# Altium PCB PCB.PcbDoc
Units mil, origin at the board's own origin, x right, y up, seen from the top; angles counter-clockwise.
Board outline 3815.03 x 1595.03 mil, 2 copper layers (Top Layer, Bottom Layer); 34 components, 24 nets, 91 pads, 348 vias.
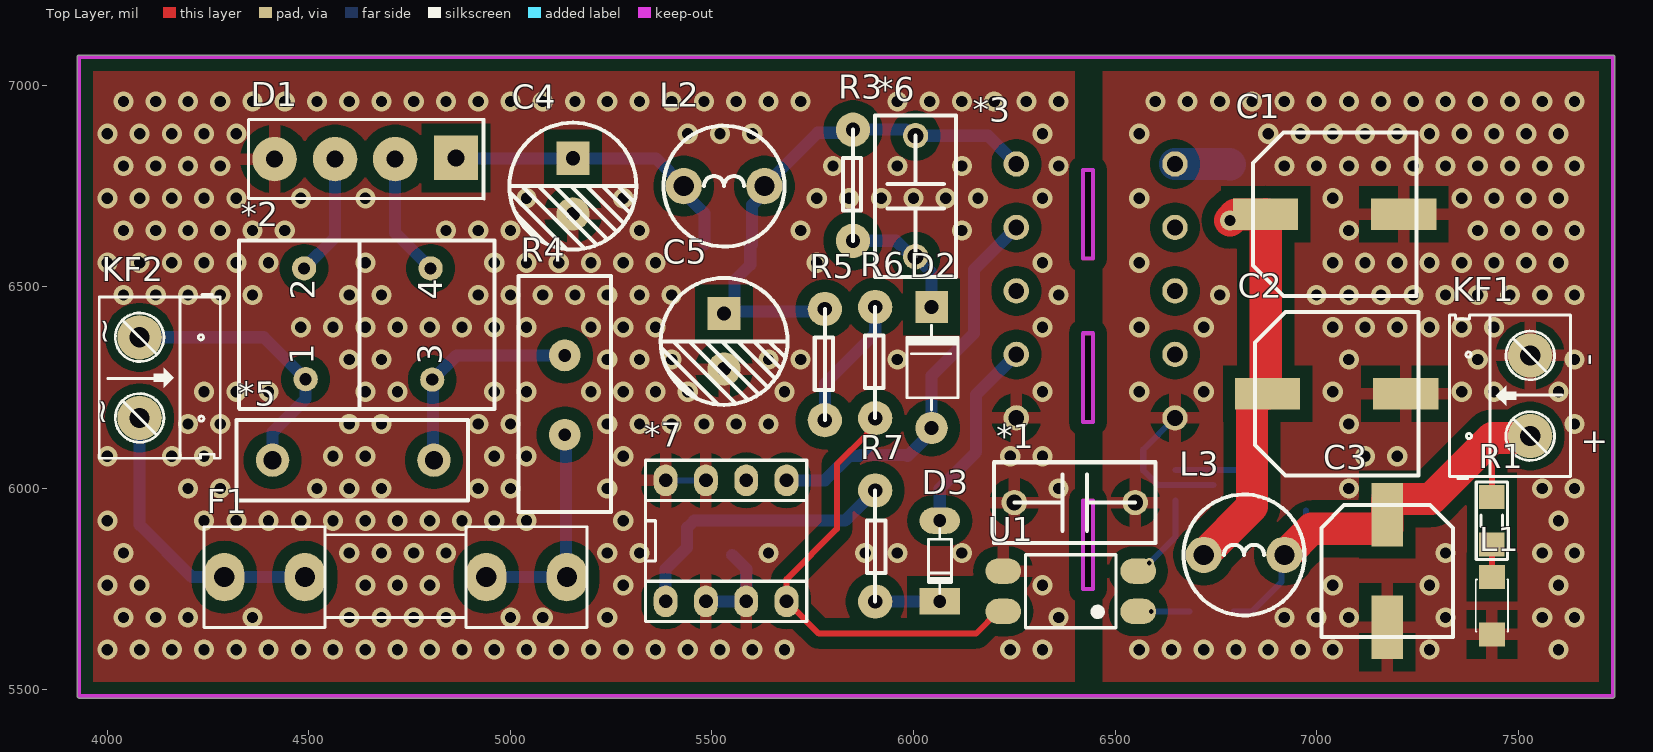
[diagram p0: Top Layer view]
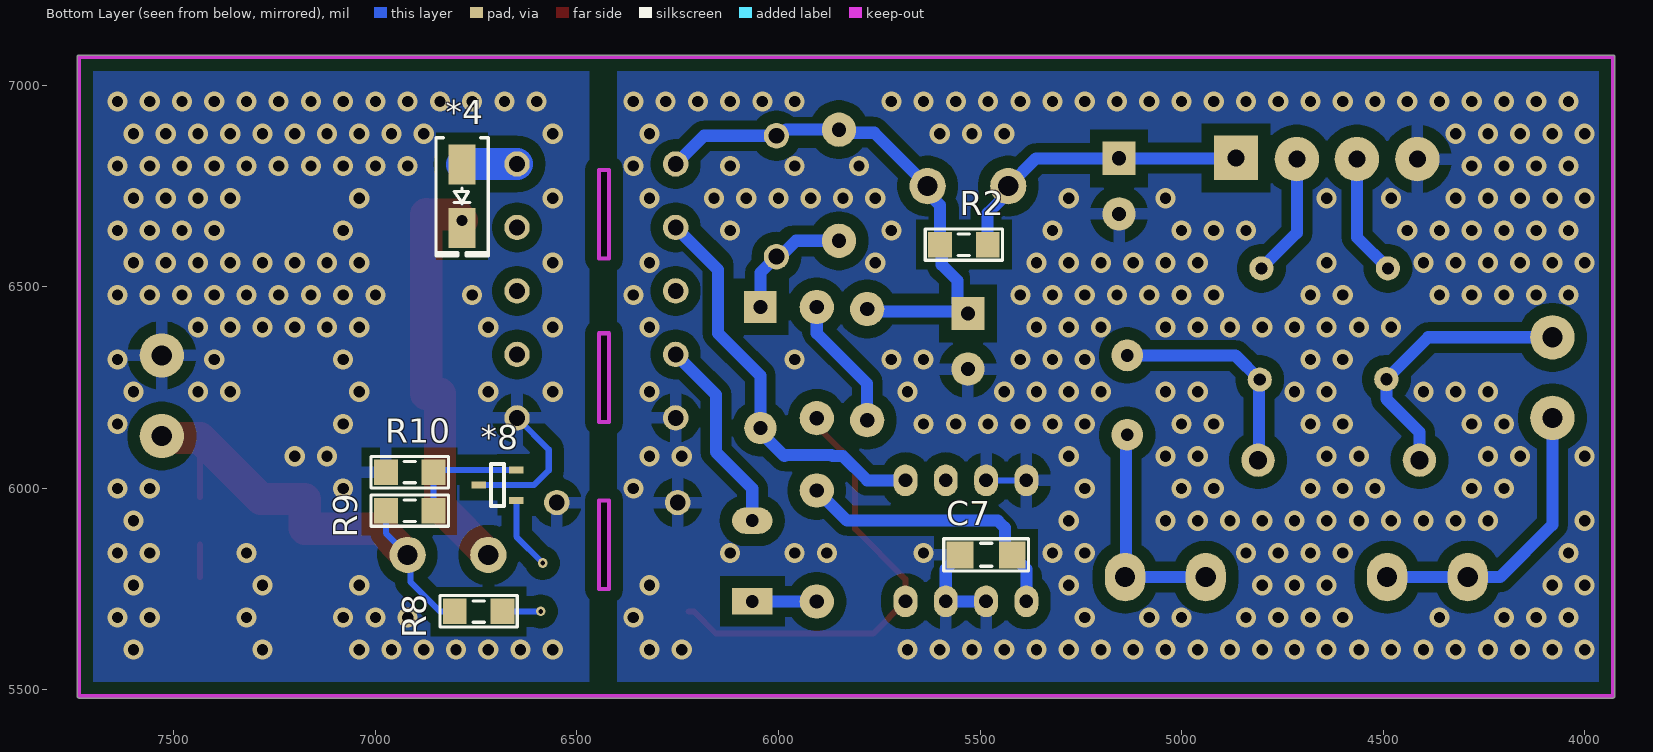
[diagram p1: Bottom Layer view, seen from below]
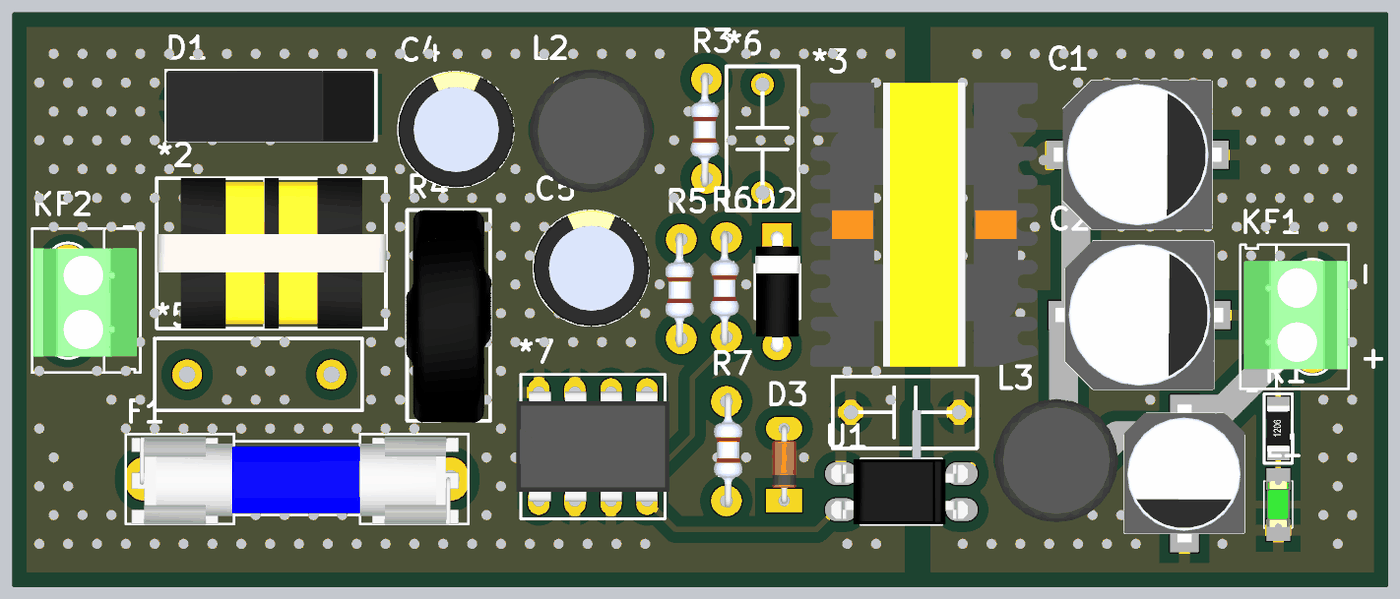
[diagram p2: 3D render of the assembled board from above, using the file's embedded part models]
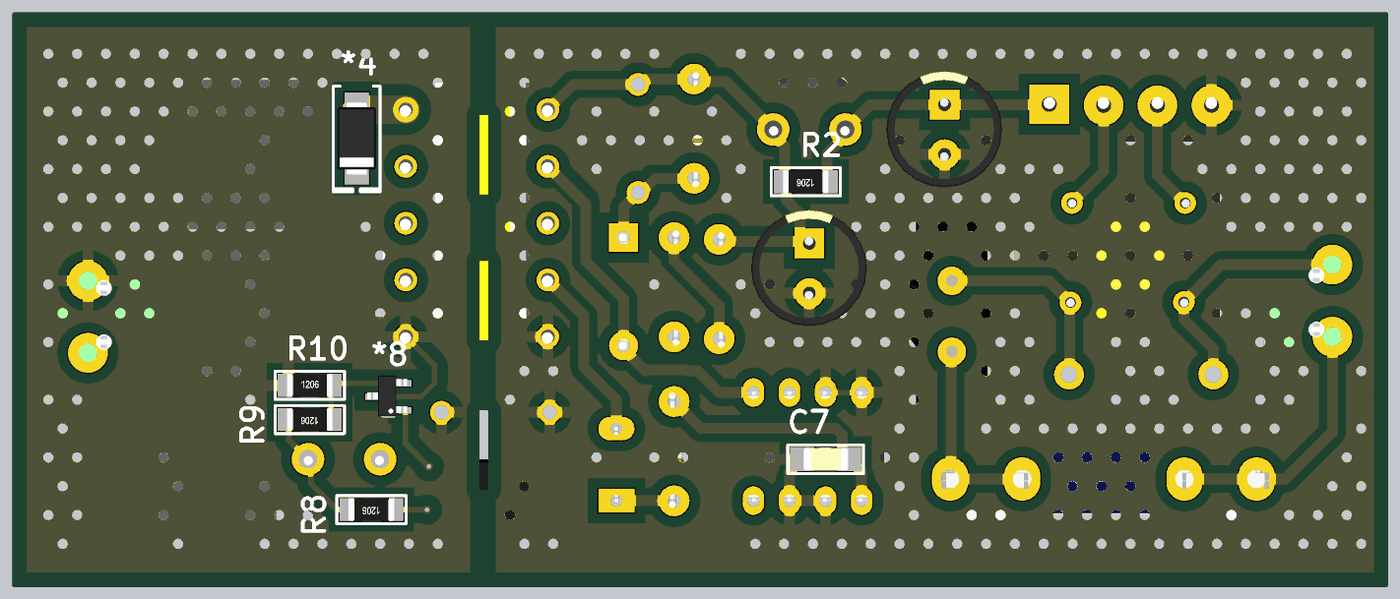
[diagram p3: 3D render of the assembled board from below, using the file's embedded part models]

## Layer stack, top to bottom
Top Solder: solder mask 0.4, Solder Resist, Dk 3.5
Top Layer: signal copper 1.4
Dielectric 1: dielectric 12.6, FR-4, Dk 4.8
Bottom Layer: signal copper 1.4
Bottom Solder: solder mask 0.4, Solder Resist, Dk 3.5

## Board outline
3930,5479.98 cw(c3930,5485) 3924.99,5485 3924.99,7070 cw(c3930,7070) 3930,7075.02 7735,7075.02 cw(c7735,7070) 7740.02,7070 7740.02,5485 cw(c7735,5485) 7735,5479.98
cut-out: 6420,6570 6420,6790 6445,6790 6445,6570
cut-out: 6420,6165 6445,6165 6445,6385 6420,6385
cut-out: 6420,5750 6445,5750 6445,5970 6420,5970

## Design rules (kind name [scope] priority, off if disabled: settings)
Clearance [All] p1: gap=30 ignorepadtopadclearanceinfootprint=FALSE
PlaneClearance [All] p1: clearance=30
PlaneConnect [All] p1: planeconnectstyle=Relief reliefexpansion=30 reliefentries=4 reliefconductorwidth=30 reliefairgap=10
PolygonConnect [All] p1: connectstyle=Relief reliefconductorwidth=30 reliefentries=4 polygonreliefangle="90 Angle" airgapwidth=30
RoomDefinition SCH [InComponentClass('SCH')] p1: confinementstyle=ConfineIn formatcopy=TRUE lockcomponents=FALSE outline 0,0 2000,0 2000,1000 0,1000
RoutingVias [All] p1: holewidth=28 width=50 viastyle="Through Hole" minholewidth=28 minwidth=50 maxholewidth=28 maxwidth=50
SolderMaskExpansion [All] p1: expansion=4 istentingtop=FALSE
Width [All] p1: maxlimit=80 minlimit=15 preferedwidth=30
28 further rules are at their usual default settings.

## Components (designator, comment, footprint, x,y, rotation, side; value= is the part's Value field where it differs from the comment)
*1 "Tu cao ap 101/1000V" "Tu cao ap" 6650,5865 r180 top
*2 "INDUCTOR UU9.8" "INDUCTOR UU9.8" 4605,6330 r90 top
*3 "Transformer EE22" "TRANSFORMER EE22" 6908.54,6407.32 r0 top
*4 "Diode SS54 (1N5824)" "DIODE SMA" 6785,6725 r270 bottom
*5 "Tu keo vang 0.1uF" "Tu keo vang 0.1uF" 4920,6020 r0 top
*6 "Tu cao ap 2.2nF 1KV" "Tu cao ap" 6105,6975 r270 top
*7 "TNY266" DIP8 5535,5870 r0 top
*8 "TL431" "TL431 SOT-23-3" 6640,5985 r0 bottom
C1 "1000uF" "tu nhom 10 (G)" 7045,6680 r0 top
C2 "1000uF" "tu nhom 10 (G)" 7050,6235 r0 top
C3 "470uF" "tu nhom 8 (f)" 7175,5795.24 r270 top
C4 "4.7uF/400V" "tu hoa 8mm" 5155,6750 r270 top
C5 "4.7uF/400V" "tu hoa 8mm" 5530,6365 r270 top
C7 "104" "tu 1206" 5485,5835 r180 bottom
D1 "2A 600V" "DIODE CAU 2A 3A CAM" 4865,6818 r180 top
D2 "1N4973" "DIODE 1A" 6045,6100 r270 top
D3 "1N4148" "DIODE 0.5A" 6065,5820 r90 top
F1 "2A" "De Cau Chi 520 630" 4715,5780 r180 top
KF1 "5V/3A" "Con 2 KF301 5.08" 7530,6130 r90 top
KF2 "AC in" "Con 2 KF301 5.08" 4080,6375 r270 top
L1 "LED 0805" LED-1206-Green 7435,5780 r270 top
L2 "2.2mH/3A" "CUON CAM 100uH3A" 5530,6750 r0 top
L3 "10uH - 3A" "CUON CAM 100uH3A" 6820,5835 r0 top
R1 "200R" "tro smd 1206" 7435,5920 r90 top
R2 "1.2k" "tro smd 1206" 5540,6605 r0 bottom
R3 "200K" "Dien tro" 5850,6614.41 r90 top
R4 "10D-9" "tro nhiet d-9" 5135,6231.57 r270 top
R5 "2M" "Dien tro" 5780,6169.41 r90 top
R6 "2M" "Dien tro" 5905,6174.41 r90 top
R7 "10K" "Dien tro" 5905,5995 r270 top
R8 "1k" "tro smd 1206" 6744.06,5695 r0 bottom
R9 "4.7k" "tro smd 1206" 6915,5945 r0 bottom
R10 "4.7k" "tro smd 1206" 6915,6040 r180 bottom
U1 "OPTO PC817 SMD" SOP4 6390,5745 r180 top value=PC817

## Footprints (in the part's own frame and the unit in brackets; to place one, negate y for a bottom-side part, rotate by r counter-clockwise, add the part's x,y. Pads: shape width x height; smd on the part's side, far side on the other; paste and mask are expansions set on the pad)
"Con 2 KF301 5.08" [mil]
  round 110 hole 50: 1(0,0) 2(200,0)
  silkscreen extent -106,-100 300,200, body extent -45,-97 255,190, height 335
"CUON CAM 100uH3A" [mil] "100uH3A"
  round 90 hole 50: 1(-100,0) 2(100,0)
  silkscreen extent -150,-150 150,150, body extent -171,-175 171,167, height 394
"De Cau Chi 520 630" [mil] "De Fuse"
  oval 100x120 hole 50: 1(-425,0) 1(-225,0) 2(225,0) 2(425,0)
  silkscreen extent -475,-125 475,125, body extent -448,-117 459,127, height 378
"Dien tro" [mm] "c?m"
  round 2.16 hole 0.9: 1(0,0) 2(7,0)
  silkscreen extent 0,-0.51 7,0.64, body extent -0.62,-0.87 7.48,1.13, height 2.5
"DIODE 0.5A" [mil] "Diode muoi, xung"
  oval 65x100 hole 32: 1(100,0)
  rect 65x100 hole 32: 2(-100,0)
  silkscreen extent -80,-30 80,28, body extent -108,-33 108,32, height 61
"DIODE 1A" [mil] "Diode 1A"
  round 80 hole 35: 1(-50,0)
  rect 80x80 hole 35: 2(-350,0)
  silkscreen extent -305,-61 -95,65, body extent -366,-61 -34,65, height 122
"DIODE CAU 2A 3A CAM" [mil] "DIODE CAU 2A 3A CAM"
  round 110 hole 42: 1(450,1) 2(300,1) 3(151,1)
  rect 110x110 hole 42: 4(0,-2)
  silkscreen extent -70,-97 515,100, body extent -62,-95 512,102, height 650
"DIODE SMA" [mm] "SMA"
  rect 2.5x1.7 smd: 1(-2,0) 2(2,0)
  silkscreen extent -3.68,-1.65 3.75,1.65, body extent -2.6,-1.37 2.6,1.37, height 2.4
DIP8 [mm] "W.300/L.400"
  oval 1.5x2 hole 0.864: 1(-3.81,-3.81) 2(-1.27,-3.81) 3(1.27,-3.81) 4(3.81,-3.81) 5(3.81,3.81) 6(1.27,3.81) 7(-1.27,3.81) 8(-3.81,3.81)
  silkscreen extent -5.08,-5.08 5.08,5.08, body extent -5.4,-3.88 5.4,3.88, height 4.5
"INDUCTOR UU9.8" [mil]
  round 60 hole 30: 1(-59,113) 2(216,117) 3(-60,-201) 4(216,-197)
  silkscreen extent -133,-356 285,279, body extent -132,-357 286,279, height 602
LED-1206-Green [mil]
  rect 60x65 smd: 1(0,0) 2(142,0)
  silkscreen extent 6,-40 136,40, body extent 7,-31 133,32, height 43
SOP4 [mm]
  oval 2.25x1.6 smd: 1(-4.25,1.27) 2(-4.25,-1.27) 3(4.25,-1.27) 4(4.25,1.27)
  silkscreen extent -2.85,-2.3 2.85,2.3, body extent -4.67,-2.29 4.93,2.31, height 3.6
"TL431 SOT-23-3" [mm]
  rect 0.9x0.44 smd: 1(0.264,0.373) 2(0.264,-1.547) 3(2.634,-0.587)
  silkscreen extent 1.05,-1.91 1.86,0.73, body extent 0.13,-2.09 2.93,0.81, height 1.3
"TRANSFORMER EE22" [mm]
  round 1.6 hole 1: 1(-16.6,10.1) 2(-16.6,6.1) 3(-16.6,2.1) 4(-16.6,-1.9) 5(-16.6,-5.9) 6(-6.6,-5.9) 7(-6.6,-1.9) 8(-6.6,2.1) 9(-6.6,6.1) 10(-6.6,10.1)
  body extent -19.6,-8.01 -3.57,12.01, height 20.81
"tro nhiet d-9" [mm]
  round 2 hole 0.8: 1(-2.5,0) 2(2.5,0)
  silkscreen extent -7.49,-2.92 7.37,2.92, body extent -7.5,-3 7.5,3, height 23.5
"tro smd 1206" [mm]
  rect 1.5x1.6 smd: 1(-1.5,0) 2(1.5,0)
  silkscreen extent -2.44,-0.99 2.44,0.99, body extent -1.6,-0.8 1.6,0.8, height 0.6
"tu 1206" [mm]
  rect 1.7x1.7 smd: 1(-1.65,0) 2(1.65,0)
  silkscreen extent -2.67,-1.02 2.67,1.02, body extent -1.57,-0.8 1.63,0.8, height 0.94
"Tu cao ap" [mm]
  round 1.6 hole 1: 1(2.54,-2.54) 2(10.16,-2.54)
  silkscreen extent 1.27,-5.08 11.43,0
"tu hoa 8mm" [mm]
  rect 2.1x2.1 hole 0.9: 1(-1.75,0)
  round 2.1 hole 0.9: 2(1.75,0)
  silkscreen extent -4,-4 4,4, body extent -4.1,-4.07 4.1,4.13, height 13.81
"Tu keo vang 0.1uF" [mil]
  round 82.68 hole 45: 1(-510,50) 2(-110,50)
  silkscreen extent -600,-50 -25,150
"tu nhom 8 (f)" [mm]
  rect 4x2 smd: 1(-3.55,0) 2(3.55,0)
  silkscreen extent -4.15,-4.15 4.15,4.15, body extent -4.85,-4.25 4.85,4.25, height 10.5
"tu nhom 10 (G)" [mm]
  rect 4.1x2 smd: 1(-4.35,0) 2(4.35,0)
  silkscreen extent -5.15,-5.15 5.15,5.15, body extent -5.9,-5.25 5.9,5.25, height 10.5

## Part data
*1: library part "Tu cao ap 1000V"
*7: library part TNY264
C1 C2: library part "Tu Nhom 1000uF 10V", "Dán", Chung_Loai=Dán, Don_Vi=Con, Ma_Hang=MH007515, So_Chan=2, Ten_Linh_Kien="Tụ Nhôm 1000uF 10V"
C3: library part "Tu Nhom 470uF 16V", "Dán", Chung_Loai=Dán, Don_Vi=Con, Ma_Hang=MH001940, So_Chan=2, Ten_Linh_Kien="Tụ Nhôm 470uF 16V 8x10.4MM"
C4 C5: library part "Tu Hoa 4.7uF 400V 8x12", "Cắm", Chung_Loai=Cắm, Don_Vi=Con, Ma_Hang=MH003744, So_Chan=2, Ten_Linh_Kien="Tụ Hóa 4.7uF 400V 8x12MM"
C7: library part "Tu 1206 104 50V 20%", "Dán", Chung_Loai=Dán, Don_Vi=Con, Ma_Hang=MH004544, So_Chan=2, Ten_Linh_Kien="Tụ 1206 104-0.1uF 20% 50V"
D1: library part "Diode CAU 2A VUONG", "Cắm", Chung_Loai=Cắm, Don_Vi=Con, Ma_Hang=MH001206, Ten_Linh_Kien="Diode Cầu 2A 600V KBP206 Vuông"
D2: library part "Diode 1N4007", "Cắm", Chung_Loai=Cắm, Don_Vi=Con, Ma_Hang=MH001063, Ten_Linh_Kien="Diode 1N4007 1A (DIP)"
D3: library part "Diode 1N4148", "Cắm", Chung_Loai=Cắm, Don_Vi=Con, Ma_Hang=MH001065, Ten_Linh_Kien="Diode 1N4148 DO35 450mA 100V ( 1N4148 DIP)"
F1: library part "De Cau Chi 520 630", "5x20mm", Ma_Hang=MH001473, Ten="Đế Cầu Chì 5x20MM 6x30MM SMD01"
KF1 KF2: library part "CON 2 KF301", "Cắm", Chung_Loai=Cắm, Don_Vi=Con, Ma_Hang=MH000987, Ten_Linh_Kien="CON 2 KF301-2P 5.08MM Xanh Dương"
L1: library part "LED 1206 Xanh La", "Dán", Chung_Loai=Dán, Don_Vi=Con, Ma_Hang=MH002947, Ten_Linh_Kien="LED1206 Màu Xanh Lá (Green)"
L2 L3: library part "CUON CAM 470uH DIP", "Cắm", Chung_Loai=Cắm, Don_Vi=Con, Ma_Hang=MH002232, Ten_Linh_Kien="Cuộn Cảm 470uH 3A 8x10MM"
R1: library part "Tro 1206 1% 200R", "Dán", Chung_Loai=Dán, Don_Vi=Con, Ma_Hang=MH005895, So_Chan=2, Ten_Linh_Kien="Trở 1206 1% 200R"
R2 R8: library part "Tro 1206 1% 1k", "Dán", Chung_Loai=Dán, Don_Vi=Con, Ma_Hang=MH005880, So_Chan=2, Ten_Linh_Kien="Trở 1206 1% 1k"
R3 R5 R6 R7: library part Resistor, "Cắm"
R4: library part "Tro Nhiet NTC 10D-9", "Cắm", Chung_Loai=Cắm, Don_Vi=Con, Ma_Hang=MH000922, So_Chan=2, Ten_Linh_Kien="Điện trở nhiệt NTC 10D-9"
R9 R10: library part "Tro 1206 5% 4.7K", "Dán", Chung_Loai=Dán, Don_Vi=Con, Ma_Hang=MH005908, So_Chan=2, Ten_Linh_Kien="Trở 1206 5% 4.7k"
U1: "Single Opto"

## Via types
v1: diameter 50, hole 28, Top Layer to Bottom Layer, tented both sides, 346 vias
v2: diameter 23.62, hole 11.81, Top Layer to Bottom Layer, tented both sides, 2 vias

## Nets (pads, with @x,y where several pads share a name; then routed paths per layer and width w, separated by ;. In a path a pad name is that pad's centre, name@x,y a point inside that pad or via, vN(x,y) a via of type N, cw(c..) or ccw(c..) an arc to the next point about the centre after c; other vN are vias at no path point)
Hi_groud: *1.2 *3.5 *7.2 *7.3 *7.7 *7.8 C4.2 C5.2 C7.1 D1.1 U1.3 | length 329.5
  Bottom Layer w15: *7.8 *7.7
  Bottom Layer w30: *7.2 *7.3 5585,5799.96 C7.1
  other v1: 4000,5600 4080,5600 4160,5600 4240,5600 4320,5600 4400,5600 4480,5600 4560,5600 4640,5600 4720,5600 4800,5600 4880,5600 4960,5600 5040,5600 5120,5600 5200,5600 5280,5600 5360,5600 5440,5600 5520,5600 5600,5600 5680,5600 6240,5600 6320,5600 4040,5680 4120,5680 4200,5680 4360,5680 4600,5680 4680,5680 4760,5680 4840,5680 5000,5680 5080,5680 5240,5680 6360,5680 4000,5760 4080,5760 4640,5760 4720,5760 4800,5760 5280,5760 6320,5760 4040,5840 4600,5840 4680,5840 4760,5840 4840,5840 5240,5840 5320,5840 5640,5840 5880,5840 5960,5840 6120,5840 4000,5920 4240,5920 4320,5920 4400,5920 4480,5920 4560,5920 4640,5920 4720,5920 4800,5920 4880,5920 4960,5920 5040,5920 5280,5920 4200,6000 4280,6000 4520,6000 4600,6000 4680,6000 4920,6000 5000,6000 5240,6000 6360,6000 4000,6080 4160,6080 4240,6080 4560,6080 4640,6080 4960,6080 5040,6080 5280,6080 6240,6080 6320,6080 4200,6160 4280,6160 4600,6160 4680,6160 4920,6160 5000,6160 5240,6160 5320,6160 5400,6160 5480,6160 5560,6160 5640,6160 4240,6240 4320,6240 4400,6240 4640,6240 4720,6240 4960,6240 5040,6240 5200,6240 5280,6240 5360,6240 5440,6240 5680,6240 6320,6240 4600,6320 4680,6320 5240,6320 5320,6320 5400,6320 5640,6320 5720,6320 5960,6320 4480,6400 4560,6400 4640,6400 4720,6400 4800,6400 4880,6400 4960,6400 5040,6400 5200,6400 5280,6400 5360,6400 6320,6400 4040,6480 4120,6480 4200,6480 4280,6480 4360,6480 4600,6480 4680,6480 4920,6480 5000,6480 5080,6480 5160,6480 5240,6480 5320,6480 5400,6480 6360,6480 4000,6560 4080,6560 4160,6560 4240,6560 4320,6560 4400,6560 4640,6560 4960,6560 5040,6560 5120,6560 5200,6560 5280,6560 5360,6560 5760,6560 6320,6560 4040,6640 4120,6640 4200,6640 4280,6640 4360,6640 4440,6640 4840,6640 4920,6640 5000,6640 5320,6640 5720,6640 6120,6640 4000,6720 4080,6720 4160,6720 4240,6720 4320,6720 4480,6720 4640,6720 5040,6720 5280,6720 5760,6720 5840,6720 5920,6720 6000,6720 6080,6720 6160,6720 6320,6720 4040,6800 4120,6800 4200,6800 4280,6800 5800,6800 5960,6800 6120,6800 6360,6800 4000,6880 4080,6880 4160,6880 4240,6880 4320,6880 5440,6880 5520,6880 5600,6880 6320,6880 4040,6960 4120,6960 4200,6960 4280,6960 4360,6960 4440,6960 4520,6960 4600,6960 4680,6960 4760,6960 4840,6960 4920,6960 5000,6960 5080,6960 5160,6960 5240,6960 5320,6960 5400,6960 5480,6960 5560,6960 5640,6960 5720,6960 5960,6960 6040,6960 6120,6960 6200,6960 6280,6960 6360,6960
Lo_gnd: *1.1 *3.6 *8.3 C1.2 C2.2 C3.2 KF1.2 L1.2 R10.1 | length 351.6
  Bottom Layer w15: *3.6 6570,6096.34 6570,6045 6606.88,6008.12 *8.3
  other v1: 6560,5600 6640,5600 6720,5600 6800,5600 6880,5600 6960,5600 7040,5600 7280,5600 7600,5600 6920,5680 7000,5680 7080,5680 7320,5680 7560,5680 7640,5680 7040,5760 7280,5760 7600,5760 7320,5840 7560,5840 7640,5840 7600,5920 7080,6000 7560,6000 7640,6000 7120,6080 7200,6080 7080,6160 7640,6160 6560,6240 6720,6240 7040,6240 7360,6240 7440,6240 7600,6240 7080,6320 7400,6320 7640,6320 6560,6400 6720,6400 7040,6400 7120,6400 7200,6400 7280,6400 7360,6400 7440,6400 6760,6480 7000,6480 7080,6480 7160,6480 7240,6480 7320,6480 7400,6480 7480,6480 7560,6480 7640,6480 6560,6560 7040,6560 7120,6560 7200,6560 7280,6560 7360,6560 7440,6560 7520,6560 7600,6560 7080,6640 7400,6640 7480,6640 7560,6640 7640,6640 6560,6720 7040,6720 7360,6720 7440,6720 7520,6720 7600,6720 6920,6800 7000,6800 7080,6800 7160,6800 7240,6800 7320,6800 7400,6800 7480,6800 7560,6800 7640,6800 6560,6880 6880,6880 6960,6880 7040,6880 7120,6880 7200,6880 7280,6880 7360,6880 7440,6880 7520,6880 7600,6880 6600,6960 6680,6960 6760,6960 6840,6960 6920,6960 7000,6960 7080,6960 7160,6960 7240,6960 7320,6960 7400,6960 7480,6960 7560,6960 7640,6960
Net*2_1: *2.1 *5.1 KF2.1 | length 697.1
  Bottom Layer w15: *5.1@4405,6070 4410,6075 *5.1
  Bottom Layer w30: KF2.1 4388,6375 *2.1 4492,6222 4410,6140 *5.1@4410,6075
Net*2_2: *2.2 D1.2 | length 302.9
  Bottom Layer w30: *2.2 4565,6623 D1.2
Net*2_3: *2.3 *5.2 R4.1 | length 555.5
  Bottom Layer w30: *5.2 4808,6072 4808,6268 *2.3 4866,6330 R4.1
Net*2_4: *2.4 D1.3 | length 307.5
  Bottom Layer w30: D1.3 4714,6634 *2.4
Net*3_1: *3.1 *6.1 C5.1 L2.2 R2.2 R3.2 R5.2 | length 1561.4
  Bottom Layer w15: C5.1 5535.55,6439.45 5541.1,6445 R5.2
  Bottom Layer w30: C5.1@5535.55,6439.45 5774.45,6439.45 R5.2 ; C5.1@5541.1,6445 5556.34,6460.24 5556.34,6516.34 5595,6555 5595,6600.94 R2.2 5599.06,6702.82 5630,6733.76 L2.2 5762.48,6882.48 5842.48,6882.48 R3.2 5981.07,6890 5996.07,6875 *6.1 6184.96,6875 *3.1
Net*3_2: *3.2 *7.5 D2.1 | length 1006.3
  Bottom Layer w30: *7.5 5780,6020 5840,6080 5866.23,6080 5868.75,6082.52 5982.48,6082.52 5985,6080 6045,6140 D2.1 6045,6280 6150,6385 6150,6542.48 *3.2
Net*3_4: *3.4 D3.1 | length 491.2
  Bottom Layer w30: D3.1 6065,6000 6155,6090 6155,6232.52 *3.4
Net*3_10: *3.10 *4.1 | length 138.1
  Bottom Layer w60: *3.10 *3.10 *3.10@6650,6805
  Bottom Layer w80: *3.10 6783.78,6804.96 *4.1
Net*4_2: *4.2 C1.1 C2.1 L3.1 | length 1023
  Top Layer w80: L3.1 6840,5955 6840,6234.37 6840.63,6235 C2.1@6874.37,6235 ; v1(6785,6665) 6799.37,6679.37 6873.11,6679.37 C1.1 C2.1@6873.74,6235.63
Net*6_2: *6.2 D2.2 R3.1 | length 312.9
  Bottom Layer w30: R3.1 5956.66,6614.41 5996.07,6575 *6.2 6045,6535 D2.2
Net*7_1: *7.1 C7.2 R7.1 | length 709.4
  Bottom Layer w30: *7.1 5385,5799.96 C7.2 5438.5,5853.46 5438.5,5902.43 5456.08,5920 5830,5920 R7.1
Net*7_4: *7.4 R6.1 U1.4 | length 1139.1
  Top Layer w15: R6.1 5905,6155.46 5883.73,6134.19 5883.73,6133.73 5810,6060 5810,5900 5685,5775 *7.4 5765,5640 6155,5640 6210,5695 U1.4
Net*8_1: *8.1 U1.2 | length 182.4
  Bottom Layer w15: v2(6585,5815) 6650.39,5880.39 *8.1
Net*8_2: *8.2 R9.1 R10.2 | length 303
  Bottom Layer w15: *8.2 6850.03,6045.91 R10.2 R9.1
NetC3_1: C3.1 KF1.1 L3.2 R1.2 R8.2 R9.2 | length 1272.1
  Top Layer w15: R1.2 7435,6125
  Top Layer w80: L3.2 6922.71,5835 6987.71,5900 7174.37,5900 7175,5900.63 7175,5973.11 7175.63,5973.74 7283.74,5973.74 7435,6125 7525,6125 KF1.1
  Bottom Layer w15: R8.2@6794.06,5695 6840,5695 6912.5,5767.5 6912.5,5827.5 L3.2 6974.06,5889.06 R9.2
NetC4_1: C4.1 D1.4 L2.1 R2.1 | length 760.1
  Bottom Layer w30: D1.4 4866.1,6818.9 C4.1 5361.1,6818.9 L2.1 5430,6733.76 5480.94,6682.82 R2.1
NetD3_2: D3.2 R7.2 | length 160.2
  Bottom Layer w30: R7.2 5905.3,5719.7 6064.7,5719.7 D3.2
NetF1_1: F1.1 R4.2 | length 555.2
  Bottom Layer w30: F1.1@4940,5780 5140,5780 5137.5,5782.5 5137.5,6130.65 R4.2
NetF1_2: F1.2 KF2.2 | length 728.8
  Bottom Layer w30: KF2.2 4080,5910 4210,5780 4290,5780 F1.2@4490,5780
NetL1_1: L1.1 R1.1 | length 80.9
  Top Layer w15: L1.1 R1.1
NetR5_1: R5.1 R6.2 | length 332.4
  Bottom Layer w30: R5.1 5780,6260 5905,6385 R6.2
NetR8_1: R8.1 U1.1 | length 95
  Bottom Layer w15: v2(6590,5695) R8.1
pads on no net: *3.3 *3.7 *3.8 *3.9 *7.6

## Polygon pours and split planes (outlines as drawn)
Hi_groud on Bottom Layer "HI_GROUD_L02_P000" (solid, pour order 0): 3930,7070 3930,5485 6400,5485 6400,7070
Lo_gnd on Bottom Layer "LO_GND_L02_P002" (solid, pour order 2): 6470,7070 6470,5485 7735,5485 7735,7070
Lo_gnd on Top Layer "LO_GND_L01_P001" (solid, pour order 1): 7735,7070 6470,7070 6470,5480 7735,5480
Hi_groud on Top Layer "HI_GROUD_L01_P003" (solid, pour order 3): 3930,7070 3930,5485 6400,5485 6400,7070

## Keep-outs
Keep-Out Layer:
  lines w10: 3930,6900 3930,7070 7735,7070 ; 3930,6965 3930,5570 3930,5485 7735,5485 ; 7735,5485 7735,7070 ; 7735,5485 7735,7070 ; 6420,5750 6420,5970 6445,5970 6445,5750 6420,5750 ; 6420,6165 6420,6385 6445,6385 6445,6165 6420,6165 ; 6420,6570 6445,6570 6445,6790 6420,6790 6420,6570

## Silkscreen, mask and mechanical layers (free items; w line width, h text height)
Top Overlay:
  text "~" at 4019.98,6355 h60 r90
  text "-" at 7699.99,6305 h60 r90
  text "~" at 4014.98,6155 h60 r90
  text "+" at 7655,6090 h60

## Text inside footprints (layer, text, board x,y; h text height)
*2: Top Overlay "3" at 4829,6307 h60 r90; Top Overlay "1" at 4512,6307 h60 r90; Top Overlay "2" at 4514,6468 h60 r90; Top Overlay "4" at 4831,6468 h60 r90